# Altium PCB BEE-DAL_EXP_V1.0.PcbDoc (part 4 of 5)
Units mm, origin at the board's own origin, x right, y up, seen from the top; angles counter-clockwise.
Board outline 93 x 90 mm, 6 copper layers (L1_TOP, L2_GND, L3_SIGNAL, L4_PWR, L5_GND, L6_BOT), stack 1.608 mm thick; 548 components, 447 nets, 1827 pads, 1131 vias.
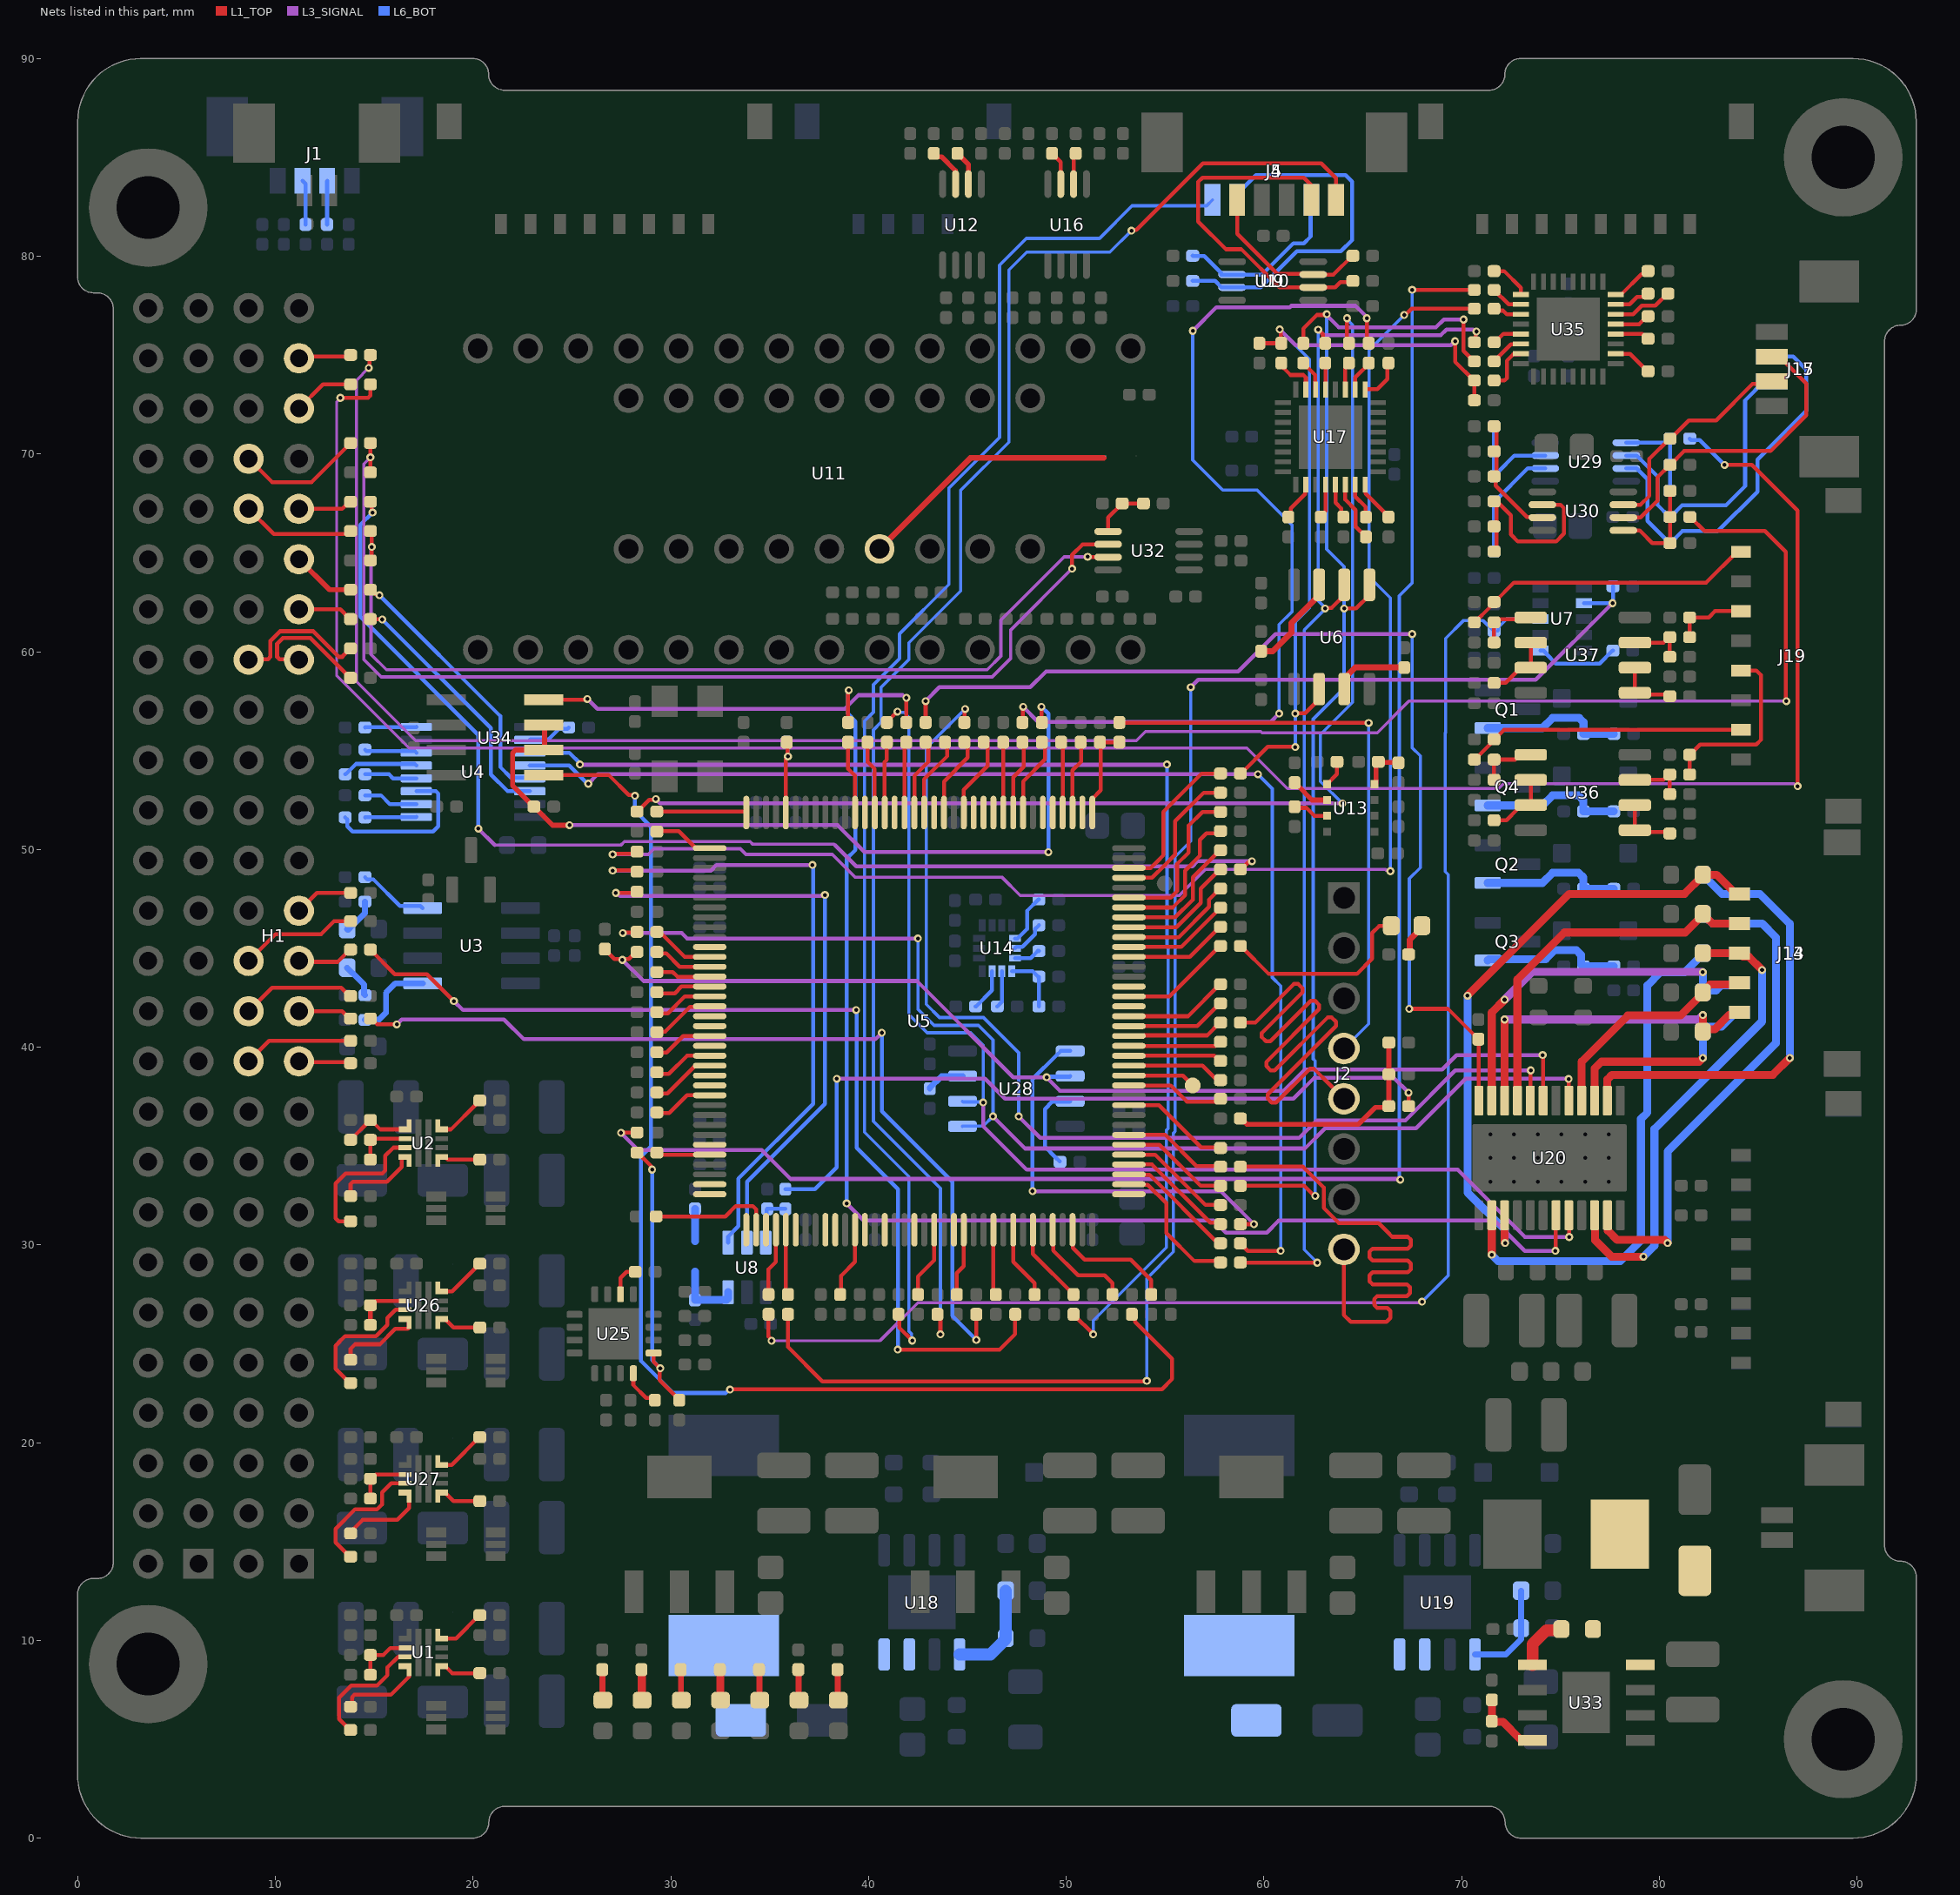
[diagram p8: the nets of this part, all layers, seen from the top]

## Via types
v1: diameter 0.4, hole 0.2, L1_TOP to L6_BOT, tented both sides, 1121 vias
v2: diameter 0.6, hole 0.3, L1_TOP to L6_BOT, tented both sides, 10 vias

## Nets (pads, with @x,y where several pads share a name; then routed paths per layer and width w, separated by ;. In a path a pad name is that pad's centre, name@x,y a point inside that pad or via, vN(x,y) a via of type N, cw(c..) or ccw(c..) an arc to the next point about the centre after c; other vN are vias at no path point) (continued)
MCU_PC104_SPI0_MOSI: R235.1 R323.1 | length 51.2
  L1_TOP w0.2: R235.1@14.805,44.933 16.043,43.695 17.664,43.695 v1(19.032,42.327) ; v1(41.481,24.704) 46.632,24.704 47.423,25.495 R323.1@47.423,26.49
  L3_SIGNAL w0.2: v1(19.032,42.327) 19.484,41.875 v1(39.375,41.875)
  L6_BOT w0.2: v1(39.375,41.875) 39.4,41.85 39.4,34.911 41.489,32.822 41.489,24.712 v1(41.481,24.704)
MCU_PC104_SPI0_SCK: R234.1 R324.2 | length 45.4
  L1_TOP w0.2: R234.1@14.805,41.45 14.847,41.45 15.147,41.15 v1(16.14,41.15) ; v1(45.456,25.196) R324.2@45.456,26.433
  L3_SIGNAL w0.2: v1(16.14,41.15) 16.389,41.4 21.567,41.4 22.567,40.4 40.347,40.4 v1(40.675,40.728)
  L6_BOT w0.2: v1(40.675,40.728) 40.675,36.755 44.244,33.186 44.244,26.408 v1(45.456,25.196)
MCU_PRAM_SPI1_nCS: R308.2 U28.1 | length 20.7
  L1_TOP w0.2: R308.2@58.808,31.048 v1(59.5,31.048)
  L3_SIGNAL w0.2: v1(48.3,32.718) 48.318,32.7 57.848,32.7 v1(59.5,31.048)
  L6_BOT w0.2: v1(48.3,32.718) 48.3,38.381 49.545,39.626 49.552,39.626 49.731,39.805 U28.1@50.204,39.805
MCU_RS232_RX_OBC_TX: R242.1 U4.13 | length 13.5
  L1_TOP w0.2: R242.1@14.805,63.133 14.857,63.133 15.095,62.895 15.227,62.895 v1(15.266,62.856)
  L6_BOT w0.2: v1(15.266,62.856) 21.377,56.745 21.377,54.171 21.92,53.628 22.837,53.628 U4.13@22.871,53.594
MCU_RS232_TX_OBC_RX: R241.1 U4.14 | length 13
  L1_TOP w0.2: R241.1@14.805,61.648 14.814,61.639 15.395,61.639 v1(15.404,61.63)
  L6_BOT w0.2: v1(15.404,61.63) 20.9,56.134 20.9,53.793 21.748,52.944 U4.14@22.871,52.944
MCU_RS485_R\E\_DE: R275.2 R313.2 U34.2 U34.3 | length 41.4
  L1_TOP w0.2: v1(48.746,57.215) 48.758,57.202 48.758,56.486 R313.2@48.824,56.42
  L1_TOP w0.25: R275.2@23.081,52.17 24.026,51.225 v1(24.874,51.225) ; R275.2@23.106,52.17 23.056,52.17 22,53.226 22,54.879 22.146,55.025 23.615,55.025 U34.3@23.615,56.295
  L3_SIGNAL w0.2: v1(24.874,51.225) 38.443,51.225 39.803,49.865 v1(49.1,49.865)
  L6_BOT w0.2: v1(48.746,57.215) 49.1,56.861 v1(49.1,49.865)
MCU_RTC_CLKOUT: R86.2 R117.1 U7.3 | length 74.8
  L1_TOP w0.2: R86.2@34.948,26.49 34.948,25.356 35.098,25.206 v1(35.098,25.151)
  L3_SIGNAL w0.15: v1(35.098,25.151) 40.581,25.151 42.505,27.075 67.809,27.075 67.82,27.087 67.962,27.087 v1(68,27.125)
  L6_BOT w0.16: v1(68,27.125) 69.325,28.45 69.325,48.73 69.175,48.88 69.175,55.89 69.194,55.909 69.194,60.676 70.085,61.567 71.093,61.567 71.618,61.042 R117.1@71.643,61.042 ; R117.1@71.826,61.042 71.851,61.067 71.851,61.225 72.28,61.653 U7.3@73.994,61.653
MCU_RTC_INT: R87.2 R118.1 U7.7 | length 81.9
  L1_TOP w0.2: R87.2@35.928,26.49 35.928,24.842 37.67,23.1 54.055,23.1 v1(54.08,23.125)
  L3_SIGNAL w0.2: v1(56.3,58.2) 56.675,58.575 73.755,58.575 v1(77.633,62.453)
  L6_BOT w0.16: v1(54.08,23.125) 54.08,28.3 55.426,29.645 55.426,35.649 55.514,35.737 55.514,49.628 56.3,50.414 v1(56.3,58.2)
  L6_BOT w0.2: U7.7@76.194,62.453 v1(77.633,62.453) 77.658,62.478 R118.1@77.658,63.303
MCU_SENSOR1_nIRQ: J4.1 R64.1 | length 79.4
  L1_TOP w0.2: R64.1@43.44,26.49 43.64,26.29 v1(43.64,25.475) ; v1(53.3,81.292) 53.338,81.33 53.554,81.33 56.923,84.7 62.9,84.7 63.65,83.95 J4.1@63.65,82.85
  L6_BOT w0.16: v1(43.64,25.475) 43.64,32.86 40.25,36.25 40.25,56.04 40.643,56.433 40.643,58.198 42.05,59.606 42.05,60.45 44.665,63.065 44.665,68.165 47.1,70.6 47.1,79.301 48.004,80.205 52.214,80.205 v1(53.3,81.292)
MCU_SENSOR2_nIRQ: J5.1 R66.1 | length 72
  L1_TOP w0.2: R66.1@41.489,26.483 41.564,26.407 41.564,25.811 v1(42.216,25.16)
  L6_BOT w0.16: v1(42.216,25.16) 42.177,25.198 42.177,25.505 42.047,25.635 42.047,33.453 39.8,35.7 39.8,56.489 40.25,56.939 40.25,58.333 41.57,59.653 41.57,60.899 44.075,63.404 44.075,68.275 46.631,70.831 46.631,79.555 47.981,80.905 51.688,80.905 53.333,82.55 57.1,82.55 J5.1@57.4,82.85
MCU_SPI0_CMD_SOLE_A: R105.2 R171.1 | length 47.9
  L1_TOP w0.2: R105.2@47.791,56.42 47.806,56.435 47.806,57.2 v1(47.822,57.215) ; v1(65.207,76.865) 65.207,75.697 R171.1@65.304,75.6
  L3_SIGNAL w0.2: v1(47.822,57.215) 48.587,56.45 60.345,56.45 v1(60.77,56.875) ; v1(56.408,76.225) 57.608,77.425 61.326,77.425 61.393,77.492 64.634,77.492 65.207,76.919 v1(65.207,76.865)
  L6_BOT w0.16: v1(56.408,76.225) 56.399,76.217 56.399,69.694 57.923,68.17 59.659,68.17 61.425,66.404 61.425,62.025 60.77,61.37 v1(60.77,56.875)
MCU_SPI0_CMD_SOLE_B: R76.1 R416.1 | length 89.6
  L1_TOP w0.2: v1(27.483,35.668) 27.487,35.672 R76.1@28.27,35.672 ; v1(67.5,78.301) R416.1@70.643,78.3
  L3_SIGNAL w0.2: v1(27.483,35.668) 28.352,34.8 34.6,34.8 36.065,33.335 66.865,33.335 v1(66.9,33.3)
  L6_BOT w0.16: v1(66.9,33.3) 66.862,33.338 66.862,33.48 66.85,33.491 66.85,62.824 67.505,63.479 67.505,78.296 v1(67.5,78.301)
MCU_SPI0_nCS_SOLE_A: R104.1 R167.1 | length 63.2
  L1_TOP w0.2: R104.1@28.27,51.92 28.32,51.92 28.907,52.507 29.204,52.507 v1(29.243,52.545) ; v1(64.207,76.865) 64.207,75.697 R167.1@64.304,75.6
  L3_SIGNAL w0.2: v1(29.243,52.545) 29.463,52.325 v1(63.975,52.324) v1(63.975,52.324)
  L6_BOT w0.16: v1(63.975,52.324) 62.86,53.439 62.86,55.81 64.489,57.439 64.489,76.525 64.207,76.808 v1(64.207,76.865)
MCU_SPI0_nCS_SOLE_B: R75.1 R412.1 | length 75.3
  L1_TOP w0.2: v1(27.062,49.748) 27.1,49.786 28.123,49.786 R75.1@28.27,49.934 ; v1(67.1,77.031) 67.154,77.031 67.473,77.35 R412.1@70.643,77.35
  L3_SIGNAL w0.16: v1(27.062,49.748) 28.868,49.748 29.152,50.033 33.519,50.033 33.802,49.75 38.169,49.75 39.319,48.6 46.74,48.6 47.672,47.669 55.723,47.669 57.046,48.992 66.145,48.992 66.191,48.946 66.354,48.946 v1(66.4,48.9)
  L6_BOT w0.16: v1(66.4,48.9) 66.4,62.713 65.318,63.794 65.318,75.249 v1(67.1,77.031)
MCU_SPI1_MISO: R108.2 R110.2 U20.7 U28.2 | length 55.6
  L1_TOP w0.2: R108.2@26.671,44.958 26.671,44.933 27.152,44.453 27.512,44.453 v1(27.55,44.414) 27.589,44.453 27.878,44.453 28.243,44.817 R110.2@28.295,44.817 ; v1(74.1,39.6) 74.113,39.587 74.113,37.313 U20.7@74.126,37.3
  L3_SIGNAL w0.2: v1(27.55,44.414) 28.619,43.346 42.454,43.346 47.324,38.476 v1(49.011,38.476) 49.687,37.8 61,37.8 62.076,38.876 69.022,38.876 69.747,39.6 v1(74.1,39.6)
  L6_BOT w0.2: v1(49.011,38.476) 49.041,38.505 50.174,38.505 U28.2@50.204,38.535
MCU_SPI1_MOSI: R111.2 U20.5 U28.5 | length 61.8
  L1_TOP w0.2: v1(27.576,45.768) 27.608,45.8 28.098,45.8 R111.2@28.27,45.972 ; v1(75.413,38.387) 75.426,38.374 U20.5@75.426,37.3
  L3_SIGNAL w0.2: v1(27.576,45.768) 30.556,45.768 30.823,45.5 v1(42.5,45.5) ; v1(46.3,36.5) 47.925,34.875 62.075,34.875 63.1,35.9 67.7,35.9 70.2,38.4 75.4,38.4 v1(75.413,38.387)
  L6_BOT w0.16: v1(42.5,45.5) 42.5,41.925 43.325,41.1 45.564,41.1 46.3,40.364 v1(46.3,36.5) 45.803,36.003 44.764,36.003 U28.5@44.756,35.995
MCU_SPI1_SCK: R107.2 U20.20 U28.6 | length 59.1
  L1_TOP w0.2: R107.2@40.931,56.42 40.931,56.438 41.463,56.97 v1(41.47,56.97) ; U20.20@75.426,31.5 75.435,31.491 75.435,30.409 v1(75.444,30.4)
  L3_SIGNAL w0.2: v1(45.8,37.2) 45.8,36 48,33.8 69.808,33.8 73.208,30.4 v1(75.444,30.4)
  L6_BOT w0.16: v1(41.47,56.97) 41.508,56.932 41.804,56.932 42.05,56.686 42.05,41.65 42.972,40.728 45.175,40.728 45.8,40.103 v1(45.8,37.2) 45.767,37.233 44.788,37.233 U28.6@44.756,37.265
MCU_STATUS_LED_1: D3.2 R31.1 | length 10
  L1_TOP w0.2: R31.1@58.808,45.116 58.833,45.116 60.249,43.7 64.7,43.7 65.478,44.478 65.478,45.771 65.837,46.131 66.436,46.131 D3.2@66.445,46.14
MCU_STEP_FAULT: R77.2 R180.1 U20.12 | length 53.7
  L1_TOP w0.2: R77.2@42.891,56.42 v1(42.891,57.5) ; v1(67.356,41.938) 69.313,41.938 70.876,40.375 U20.12@70.876,37.3
  L3_SIGNAL w0.2: v1(42.891,57.5) 43.591,58.2 48.185,58.2 48.985,59 58.7,59 60.592,60.892 v1(67.5,60.892)
  L6_BOT w0.16: v1(67.356,41.938) 67.356,48.523 67.914,49.082 67.914,54.727 67.5,55.141 v1(67.5,60.892)
MCU_STEP_SLEEP: R30.2 U20.8 | length 54.5
  L1_TOP w0.2: R30.2@44.89,56.552 44.871,56.571 44.871,57.085 v1(44.89,57.105) ; U20.8@73.476,37.3 73.488,37.312 73.488,38.813 v1(73.5,38.825)
  L3_SIGNAL w0.2: v1(47.6,36.5) 48.686,35.414 61.789,35.414 62.675,36.3 67.158,36.3 69.683,38.825 v1(73.5,38.825)
  L6_BOT w0.16: v1(44.89,57.105) 42.925,55.14 42.925,42.171 43.596,41.5 45.819,41.5 47.6,39.719 v1(47.6,36.5)
MCU_STEP_SPI1_nCS: R179.2 U20.19 | length 67.1
  L1_TOP w0.2: R179.2@38.972,56.42 38.972,58.019 v1(39,58.047) ; v1(74.746,29.698) 74.761,29.713 74.761,31.485 U20.19@74.776,31.5
  L3_SIGNAL w0.2: v1(38.9,32.1) 39.758,31.242 57.458,31.242 58.077,30.623 60.145,30.623 60.747,31.225 71.676,31.225 73.203,29.698 v1(74.746,29.698)
  L6_BOT w0.2: v1(38.9,32.1) 38.9,49.538 39.347,49.985 39.347,56.476 38.962,56.861 38.962,58.009 v1(39,58.047)
MCU_SWDIO: J2.8 R96.1 | length 30.5
  L1_TOP w0.2: R96.1@58.808,33.955 61.97,33.955 63.025,32.9 63.025,31.867 63.792,31.1 65.8,31.1 66.24,30.66 66.49,30.41 67.284,30.41 67.434,30.26 67.434,29.96 67.284,29.81 65.494,29.81 65.344,29.66 65.344,29.36 65.494,29.21 67.284,29.21 67.434,29.06 67.434,28.76 67.284,28.61 65.494,28.61 65.344,28.46 65.344,28.16 65.494,28.01 67.239,28.01 67.389,27.86 67.389,27.56 67.239,27.41 65.729,27.41 65.579,27.26 65.579,26.96 65.729,26.81 66.25,26.81 66.4,26.66 66.4,26.3 66.275,26.175 66.2,26.1 64.4,26.1 64.05,26.45 J2.8@64.05,29.77
MCU_TRACESWO: J2.4 R94.1 | length 29.5
  L1_TOP w0.2: R94.1@52.691,56.42 52.701,56.41 65.29,56.41 v1(65.3,56.4)
  L6_BOT w0.16: J2.4@64.2,40 64.2,40.08 65.295,41.175 65.295,56.395 v1(65.3,56.4)
MCU_TST: TP1.1 U5.85 | length 3.4
  L1_TOP w0.2: U5.85@53.172,38.564 55.9,38.564 TP1.1@56.4,38.064
MCU_TSWCLK: J2.5 R99.1 | length 30.9
  L1_TOP w0.2: R99.1@58.808,41.24 59.428,41.24 59.569,41.24 61.524,43.194 61.736,43.194 61.948,42.982 61.948,42.77 59.898,40.72 59.898,40.507 60.11,40.295 60.322,40.295 62.376,42.349 62.588,42.349 62.8,42.137 62.8,41.925 60.127,39.252 60.127,39.04 60.339,38.828 60.551,38.828 63.224,41.5 63.436,41.5 63.648,41.288 63.648,41.076 60.189,37.616 60.189,37.404 60.401,37.192 60.613,37.192 62.324,38.903 62.536,38.903 63.348,38.091 63.419,38.021 J2.5@64.05,37.39
MCU_UART0_RX_OBC_TX: R46.2 U4.12 | length 64.2
  L1_TOP w0.2: R46.2@58.808,30.078 59.186,29.7 v1(60.85,29.7)
  L3_SIGNAL w0.2: v1(25.831,53.325) 26.306,53.8 v1(59.7,53.8)
  L6_BOT w0.16: v1(59.7,53.8) 60.425,53.075 60.425,43.52 60.85,43.095 v1(60.85,29.7)
  L6_BOT w0.2: U4.12@22.871,54.244 24.861,54.244 25.781,53.325 v1(25.831,53.325)
MCU_UART0_TX_OBC_RX: R48.2 U4.11 | length 64.2
  L1_TOP w0.2: R48.2@50.39,26.465 51.37,25.485 v1(51.37,25.475)
  L3_SIGNAL w0.2: v1(25.406,54.301) 25.425,54.282 55.082,54.282 v1(55.1,54.3)
  L6_BOT w0.16: v1(51.37,25.475) 51.37,26.177 55.066,29.872 55.066,35.798 55.154,35.886 55.154,45.011 55.1,45.065 v1@55.1,54.208
  L6_BOT w0.2: U4.11@22.871,54.894 24.865,54.894 25.406,54.354 v1(25.406,54.301)
MCU_UART4_RX: R57.1 U34.1 | length 66.1
  L1_TOP w0.2: U34.1@23.615,53.755 26.873,53.755 27.873,52.755 28.154,52.755 v1(28.192,52.716) ; v1(33,22.685) 33.015,22.7 54.844,22.7 55.361,23.217 55.361,24.239 53.493,26.107 53.493,26.321 R57.1@53.324,26.49
  L6_BOT w0.2: v1(28.192,52.716) 28.192,51.956 29,51.148 29,34.975 28.5,34.475 28.5,24.129 30.119,22.51 32.783,22.51 32.957,22.685 v1(33,22.685)
MCU_UART4_TX: R34.1 U34.4 | length 20.2
  L1_TOP w0.2: U34.4@23.584,57.565 25.685,57.565 25.729,57.609 v1(25.783,57.609) ; R34.1@41.911,56.42 41.916,56.424 41.916,57.664 v1(41.92,57.669)
  L3_SIGNAL w0.2: v1(25.783,57.609) 26.292,57.1 38.8,57.1 39.5,57.8 41.735,57.8 41.866,57.669 v1(41.92,57.669)
MCU_USART_RXD2: R54.1 R165.2 R166.1 R410.2 R411.1 U6.2 | length 41.9
  L1_TOP w0.2: R54.1@58.808,53.839 58.846,53.839 60.2,55.193 61.574,55.193 v1(61.592,55.175) ; R165.2@59.77,75.6 60.1,75.6 60.77,75.6 R166.1@60.785,75.615 ; v1(60.8,76.3) 60.8,76.246 60.851,76.195 60.851,75.631 R166.1@60.881,75.6 ; v1(61.592,56.875) 61.6,56.883 62.092,56.883 62.796,57.587 U6.2@62.796,58.112 ; v1(69.668,75.7) 69.668,74.666 70.618,73.716 R411.1@70.643,73.716 R410.2@70.643,72.716
  L3_SIGNAL w0.2: v1(60.8,76.3) 61.6,75.5 69.451,75.5 69.651,75.7 v1(69.668,75.7)
  L6_BOT w0.16: v1(60.8,76.3) 62.3,74.8 62.3,62.222 61.592,61.514 v1(61.592,56.875) v1(61.592,55.175)
MCU_USART_SCK2: R56.1 R168.1 R413.1 U6.6 | length 63.4
  L1_TOP w0.2: R56.1@58.808,29.109 58.813,29.105 62.695,29.105 v1(62.7,29.1) ; v1(62.747,76.285) 62.77,76.285 62.999,76.056 62.999,75.705 R168.1@63.104,75.6 ; v1(63.091,62.184) 63.129,62.222 63.43,62.222 64.066,62.857 U6.6@64.066,63.382 ; R413.1@70.643,75.65 70.709,75.716 70.709,76.155 v1(70.747,76.193)
  L3_SIGNAL w0.2: v1(62.747,76.285) 63.032,76 68.943,76 69.243,76.3 70.587,76.3 70.693,76.193 v1(70.747,76.193)
  L6_BOT w0.16: v1(62.7,29.1) 62.04,29.76 62.04,61.097 63.091,62.148 63.091,62.238 62.75,62.578 62.75,74.845 62.747,74.848 v1(62.747,76.285)
MCU_USART_TXD2: R55.1 R169.1 R414.1 U6.5 | length 63.7
  L1_TOP w0.2: R55.1@58.808,32.986 62.038,32.986 62.546,32.478 v1(62.6,32.478) ; R169.1@61.993,75.6 61.993,76.345 62.678,77.031 63.142,77.031 v1(63.178,77.067) ; v1(64.06,62.184) 64.662,62.184 65.336,62.857 U6.5@65.336,63.382 ; v1(70.1,76.8) 70.093,76.793 70.093,75.208 70.618,74.683 R414.1@70.643,74.683
  L3_SIGNAL w0.2: v1(63.178,77.067) 63.178,77.013 63.791,76.4 68.7,76.4 69.1,76.8 v1(70.1,76.8)
  L6_BOT w0.16: v1(62.6,32.478) 62.6,39.303 62.495,39.408 62.495,56.59 64.06,58.155 v1(64.06,62.184) 64.06,64.303 63.178,65.184 v1(63.178,77.067)
MCU_WD_DONE: R83.1 U8.4 | length 32.3
  L1_TOP w0.2: v1(27.062,48.931) 27.067,48.936 28.265,48.936 R83.1@28.27,48.941
  L3_SIGNAL w0.2: v1(27.062,48.931) 32.027,48.931 32.311,49.214 v1(37.166,49.214)
  L6_BOT w0.2: U8.4@32.903,30.116 32.903,30.426 33.425,30.949 33.425,33.355 37.2,37.13 37.2,49.18 v1(37.166,49.214)
MCU_WD_nRESET: R80.2 R123.1 | length 38.4
  L1_TOP w0.2: R80.2@67.32,37.02 67.32,36.96 v1(67.32,37.7)
  L3_SIGNAL w0.2: v1(38.4,38.4) 45.9,38.4 46.9,37.4 61.5,37.4 62.542,38.442 66.578,38.442 v1(67.32,37.7)
  L6_BOT w0.2: R123.1@35.8,32.819 37.298,32.819 38.4,33.921 v1(38.4,38.4)
MCU_WD_WAKE: R85.1 U8.5 | length 31
  L1_TOP w0.2: v1(27.225,47.8) 28.234,47.8 R85.1@28.295,47.861
  L3_SIGNAL w0.2: v1(27.225,47.8) 27.279,47.8 27.44,47.639 37.608,47.639 37.65,47.681 37.781,47.681 v1(37.8,47.7)
  L6_BOT w0.2: U8.5@33.853,30.116 33.853,33.186 37.8,37.134 v1(37.8,47.7)
MOTOR_1_OUT_1: C88.2 J13.1 U20.2 | length 23
  L1_TOP w0.4: U20.2@77.376,37.3 77.376,38.366 77.61,38.6 85.748,38.6 v1(86.6,39.452)
  L6_BOT w0.4: C88.2@82.2,48.721 83.17,47.752 J13.1@84.058,47.752 85.086,47.752 86.6,46.238 v1(86.6,39.452)
MOTOR_1_OUT_2: C87.2 J13.2 U20.23 | length 26
  L1_TOP w0.4: U20.23@77.376,31.5 77.401,31.475 77.401,30.723 77.869,30.256 80.269,30.256 v1(80.425,30.1)
  L6_BOT w0.4: v1(80.425,30.1) 80.425,34.725 85.9,40.2 85.9,45.552 85.2,46.252 J13.2@84.058,46.252 82.686,46.252 82.469,46.468 82.446,46.468 C87.2@82.2,46.715
MOTOR_1_OUT_3: C86.2 J13.3 U20.14 | length 28.5
  L1_TOP w0.4: v1(71.526,29.5) U20.14@71.526,31.5
  L6_BOT w0.4: v1(71.526,29.5) 71.853,29.173 78.023,29.173 79.073,30.224 79.073,36.373 79.396,36.696 79.396,43.117 80.069,43.791 81.287,43.791 82.2,44.704 C86.2@82.2,44.754 ; C86.2@82.201,44.753 J13.3@84.057,44.753
MOTOR_1_OUT_4: C85.2 J13.4 U20.11 | length 19.1
  L1_TOP w0.4: U20.11@71.526,37.3 71.526,41.75 v1(72.176,42.4)
  L3_SIGNAL w0.4: v1(72.176,42.4) 73.576,43.8 82.191,43.8 v1(82.2,43.791)
  L6_BOT w0.4: v1(82.2,43.791) C85.2@82.2,42.77 82.298,42.77 82.4,42.871 82.88,42.871 83.145,43.137 83.943,43.137 J13.4@84.058,43.252
MOTOR_1_OUT_5: C84.2 J13.5 U20.3 | length 10.9
  L1_TOP w0.4: U20.3@76.726,37.3 76.726,37.7 76.726,38.2 76.726,38.919 77.074,39.266 82.015,39.266 v1(82.201,39.452)
  L6_BOT w0.4: v1@82.2,39.453 82.2,40.836 82.4,41.036 83.151,41.036 83.867,41.752 J13.5@84.058,41.752
MOTOR_2_OUT_1: C93.2 J14.1 U20.10 | length 17.3
  L1_TOP w0.4: U20.10@72.176,37.348 v1(72.176,41.4) ; v1@82.2,41.621 C93.2@82.2,40.786 82.319,40.904 82.804,40.904 83.522,41.622 83.928,41.622 J14.1@84.058,41.752
  L3_SIGNAL w0.4: v1(72.176,41.4) 81.979,41.4 v1(82.201,41.622)
MOTOR_2_OUT_2: C92.2 J14.2 U20.4 | length 11.6
  L1_TOP w0.4: U20.4@76.076,37.3 76.076,37.7 76.076,38.2 76.076,39.266 78.41,41.6 81.08,41.6 82.2,42.72 82.2,42.793 82.568,43.161 83.967,43.161 J14.2@84.058,43.252
MOTOR_2_OUT_3: C91.2 J14.3 U20.22 | length 24.3
  L1_TOP w0.4: U20.22@76.726,31.5 76.751,31.475 76.751,30.237 77.589,29.4 v1(79.2,29.4) ; C91.2@82.4,44.884 82.4,44.798 82.446,44.752 J14.3@84.058,44.752 84.238,44.572 84.528,44.572 v1@85.181,43.919
  L6_BOT w0.4: v1(79.2,29.4) 79.757,29.957 79.757,35.857 85.2,41.3 v1(85.2,43.9)
MOTOR_2_OUT_4: C90.2 J14.4 U20.9 | length 18.9
  L1_TOP w0.4: U20.9@72.826,37.3 72.826,37.8 72.826,43.424 75.202,45.8 81.312,45.8 C90.2@82.2,46.688 ; C90.2@82.2,46.738 C90.2@82.2,46.688 ; J14.4@84.058,46.252 82.686,46.252 82.45,46.488 82.4,46.488 C90.2@82.2,46.688
MOTOR_2_OUT_5: C89.2 J14.5 U20.15 | length 31.2
  L1_TOP w0.4: v1(70.3,42.6) 75.452,47.752 81.28,47.752 82.2,48.671 C89.2@82.2,48.721 82.898,48.721 J14.5@83.867,47.752 ; U20.15@72.176,31.5 72.176,30.124 v1(72.2,30.1)
  L6_BOT w0.4: v1(70.3,42.6) 70.3,32.655 72.2,30.755 v1(72.2,30.1)
NetC5_2: C5.2 U1.10 | length 2.4
  L1_TOP w0.2: U1.10@18.412,10.091 19.137,10.091 20.318,11.273 C5.2@20.343,11.273
NetC6_2: C6.2 U1.7 | length 2.1
  L1_TOP w0.2: U1.7@18.412,8.691 18.587,8.691 18.937,8.341 C6.2@20.343,8.341
NetC11_2: C11.2 U2.10 | length 2.5
  L1_TOP w0.2: U2.10@18.412,35.844 18.885,35.844 20.168,37.126 20.168,37.151 20.318,37.301 C11.2@20.343,37.301
NetC12_2: C12.2 U2.7 | length 2
  L1_TOP w0.2: U2.7@18.412,34.444 18.587,34.444 18.713,34.317 C12.2@20.343,34.317
NetC17_1: C17.1 U4.3 | length 8.1
  L6_BOT w0.2: C17.1@13.533,51.619 13.638,51.515 13.638,51.162 13.9,50.9 17.97,50.9 18.235,51.165 18.235,52.827 18.118,52.944 U4.3@17.131,52.944
NetC17_2: C17.2 U4.1 | length 2.6
  L6_BOT w0.2: C17.2@14.533,51.619 14.546,51.632 17.118,51.632 U4.1@17.131,51.644
NetC19_1: C19.1 D17.1 L3.1 U33.8
NetC19_2: C19.2 U33.1 | length 2.8
  L1_TOP w0.6: U33.1@73.586,8.753 73.588,8.756 73.588,9.808 74.295,10.515 74.997,10.515 C19.2@75.049,10.567
NetC23_2: C23.2 R78.1 R80.1 R81.2 | length 11.2
  L1_TOP w0.25: R81.2@58.808,36.394 58.846,36.394 59.143,36.097 64.785,36.097 65.649,36.96 66.26,36.96 R80.1@66.32,37.02 66.32,39.175 R78.1@66.32,40.23
NetC24_2: C24.2 R113.2 U5.140 | length 4.4
  L1_TOP w0.2: U5.140@35.822,51.864 35.822,54.546 35.928,54.652 v1(35.928,54.707) ; R113.2@35.84,55.4 35.899,55.341 35.899,54.728 v1@35.921,54.707
  L6_BOT w0.2: C24.2@35.87,55.42 35.899,55.391 35.899,54.735 v1(35.928,54.707)
NetC65_1: C65.1 U17.24 | length 2.2
  L1_TOP w0.2: U17.24@65.12,68.45 65.147,68.423 65.147,67.991 66.329,66.809 C65.1@66.385,66.809
NetC66_1: C66.1 U17.22 | length 3.1
  L1_TOP w0.2: U17.22@64.12,68.45 64.12,67.686 64.637,67.169 64.637,66.334 C66.1@65.162,65.809
NetC66_2: C66.2 U17.23 | length 1.8
  L1_TOP w0.2: U17.23@64.62,68.45 64.62,67.851 65.154,67.317 65.154,66.971 C66.2@65.211,66.915
NetC67_2: C67.2 U17.20 | length 1.7
  L1_TOP w0.2: C67.2@62.879,66.809 62.879,66.861 63.12,67.103 U17.20@63.12,68.45
NetC72_2: C72.2 R174.1 U18.5 | length 5.1
  L6_BOT w0.6: U18.5@44.607,9.287 46.168,9.287 C72.2@46.942,10.061 ; C72.2@46.942,10.111 R174.1@46.942,12.511
NetC77_2: C77.2 R177.1 U19.5 | length 5.1
  L6_BOT w0.3: U19.5@70.679,9.288 72.24,9.288 73.014,10.062 ; 73.014,10.112 R177.1@73.014,12.511
NetC126_2: C126.2 U26.10 | length 2.5
  L1_TOP w0.2: U26.10@18.412,27.646 18.939,27.646 20.168,28.876 20.168,28.901 20.318,29.051 C126.2@20.343,29.051
NetC127_2: C127.2 U26.7 | length 2.1
  L1_TOP w0.2: U26.7@18.412,26.246 18.587,26.246 19.012,25.821 C127.2@20.343,25.821
NetC132_2: C132.2 U27.10 | length 2.5
  L1_TOP w0.2: U27.10@18.412,18.867 18.914,18.867 20.318,20.272 C132.2@20.343,20.272
NetC133_2: C133.2 U27.7 | length 2.1
  L1_TOP w0.2: U27.7@18.412,17.467 18.587,17.467 19.012,17.042 C133.2@20.343,17.042
NetC142_1: C142.1 U4.5 | length 3.8
  L6_BOT w0.2: C142.1@13.533,53.799 13.558,53.799 14.083,54.324 17.051,54.324 U4.5@17.131,54.244
NetC142_2: C142.2 U4.4 | length 2.7
  L6_BOT w0.2: C142.2@14.533,53.799 15.749,53.799 15.954,53.594 U4.4@17.131,53.594
NetC143_2: C143.2 U4.6 | length 2.7
  L6_BOT w0.2: C143.2@14.533,55.048 14.61,54.971 17.054,54.971 U4.6@17.131,54.894
NetC144_2: C144.2 U4.2 | length 2.8
  L6_BOT w0.2: C144.2@14.533,52.739 15.344,52.739 15.789,52.294 U4.2@17.131,52.294
NetC171_2: C171.2 R345.2 U36.3 | length 2.9
  L1_TOP w0.2: U36.3@78.77,53.517 80.208,53.517 80.483,53.792 R345.2@80.535,53.792 C171.2@80.535,52.796
NetC173_2: C173.2 R348.2 U36.5 | length 3
  L1_TOP w0.2: C173.2@71.643,53.521 R348.2@71.643,54.544 72.706,54.544 72.949,54.787 U36.5@73.5,54.787
NetC176_2: C176.2 R351.2 U37.3 | length 2.9
  L1_TOP w0.2: U37.3@78.77,60.461 80.208,60.461 80.483,60.736 R351.2@80.535,60.736 C176.2@80.535,59.741
NetC178_2: C178.2 R354.2 U37.5 | length 2.8
  L1_TOP w0.2: C178.2@71.643,60.466 R354.2@71.643,61.338 ; R354.2@71.643,61.488 71.793,61.638 73.407,61.638 U37.5@73.5,61.731
NetC409_1: C409.1 U35.24 | length 2.1
  L1_TOP w0.2: U35.24@77.794,78.066 78.073,78.066 79.088,79.081 79.265,79.081 C409.1@79.435,79.25
NetC410_1: C410.1 U35.22 | length 3.1
  L1_TOP w0.2: U35.22@77.794,77.066 78.679,77.066 79.115,77.503 79.804,77.503 80.41,78.108 C410.1@80.435,78.108
NetC410_2: C410.2 U35.23 | length 1.9
  L1_TOP w0.2: U35.23@77.794,77.566 78.5,77.566 78.873,77.939 79.265,77.939 C410.2@79.435,78.108
NetC411_2: C411.2 U35.20 | length 1.7
  L1_TOP w0.2: U35.20@77.794,76.066 79.141,76.066 79.382,75.825 C411.2@79.435,75.825
NetD3_1: D3.1 R35.1 | length 1.7
  L1_TOP w0.3: R35.1@67.36,44.69 67.379,44.709 67.379,45.44 67.995,46.056 D3.1@67.995,46.14
NetD4_2: D4.2 L1.1 U18.7 U18.8
NetD6_2: D6.2 L2.1 U19.7 U19.8
NetD10_1: D10.1 R5.2 | length 1.7
  L1_TOP w0.3: R5.2@26.535,8.638 26.551,8.622 26.551,6.999 D10.1@26.567,6.983
NetD11_1: D11.1 R13.2 | length 1.6
  L1_TOP w0.4: R13.2@32.483,8.52 32.502,8.501 32.502,6.994 D11.1@32.52,6.975
NetD12_1: D12.1 R256.2 | length 1.6
  L1_TOP w0.3: R256.2@38.431,8.52 38.452,8.499 38.452,6.996 D12.1@38.473,6.975
NetD13_1: D13.1 R257.2 | length 1.6
  L1_TOP w0.3: R257.2@34.466,8.52 34.485,8.501 34.485,6.994 D13.1@34.505,6.975
NetD14_1: D14.1 R258.2 | length 1.6
  L1_TOP w0.3: R258.2@36.448,8.52 36.469,8.5 36.469,6.995 D14.1@36.489,6.975
NetD15_1: D15.1 R263.2 | length 1.6
  L1_TOP w0.3: R263.2@30.501,8.52 30.518,8.502 30.518,6.993 D15.1@30.536,6.975
NetD16_1: D16.1 R271.2 | length 1.7
  L1_TOP w0.4: R271.2@28.518,8.52 28.535,8.503 28.535,6.882 D16.1@28.552,6.865
NetH1_21: H1.21 R233.2 | length 2.7
  L1_TOP w0.2: H1.21@11.19,39.28 11.237,39.233 13.758,39.233 R233.2@13.805,39.186
NetH1_22: H1.22 R311.2 | length 5.6
  L1_TOP w0.2: H1.22@8.65,39.28 9.688,40.318 13.667,40.318 R311.2@13.805,40.456
NetH1_23: H1.23 R234.2 | length 2.8
  L1_TOP w0.2: H1.23@11.19,41.82 13.383,41.82 13.753,41.45 R234.2@13.805,41.45
NetH1_24: H1.24 R307.1 | length 5.8
  L1_TOP w0.2: H1.24@8.65,41.82 9.83,43 13.336,43 13.753,42.583 R307.1@13.805,42.583
NetH1_25: H1.25 R235.2 | length 2.9
  L1_TOP w0.2: H1.25@11.19,44.36 11.237,44.313 13.16,44.313 13.78,44.933 R235.2@13.805,44.933
NetH1_26: H1.26 R312.1 | length 6
  L1_TOP w0.2: H1.26@8.65,44.36 10.001,45.711 12.311,45.711 12.97,46.37 R312.1@13.805,46.37
NetH1_27: H1.27 R236.2 | length 3
  L1_TOP w0.2: H1.27@11.19,46.9 12.096,47.806 R236.2@13.805,47.806
NetH1_39: H1.39 R241.2 | length 2.8
  L1_TOP w0.2: H1.39@11.19,62.14 13.284,62.14 13.78,61.644 R241.2@13.805,61.644
NetH1_41: H1.41 R242.2 | length 3.3
  L1_TOP w0.254: H1.41@11.19,64.68 12.737,63.133 R242.2@13.805,63.133
NetH1_43: H1.43 R243.2 | length 2.8
  L1_TOP w0.2: H1.43@11.19,67.22 13.379,67.22 13.742,67.583 R243.2@13.805,67.583
NetH1_44: H1.44 R244.1 | length 5.7
  L1_TOP w0.2: H1.44@8.65,67.22 9.919,65.951 13.655,65.951 R244.1@13.805,66.101
NetH1_46: H1.46 R246.1 | length 6.5
  L1_TOP w0.2: H1.46@8.65,69.76 9.83,68.58 11.831,68.58 R246.1@13.805,70.554
NetH1_47: H1.47 R304.2 | length 3.1
  L1_TOP w0.2: H1.47@11.19,72.3 12.412,73.522 R304.2@13.805,73.522
NetH1_49: H1.49 R305.2 | length 2.7
  L1_TOP w0.2: H1.49@11.19,74.84 11.273,74.923 13.722,74.923 R305.2@13.805,75.006
NetJ1_2: J1.2 R25.1 | length 2.3
  L6_BOT w0.2: J1.2@11.374,83.81 11.525,83.659 R25.1@11.525,81.605
NetJ1_3: J1.3 R26.1 | length 2.2
  L6_BOT w0.2: R26.1@12.618,81.605 12.618,83.804 J1.3@12.624,83.81
NetJ4_2: J4.2 R128.2 U9.6 | length 18.1
  L1_TOP w0.2: J4.2@62.4,82.85 62.4,83.6 62.025,83.975 56.892,83.975 56.679,83.762 56.679,81.753 58.08,80.352 58.863,80.352 60.79,78.425 U9.6@62.495,78.425 63.606,78.425 63.875,78.694 64.444,78.694 R128.2@64.5,78.75
NetJ4_5: J4.5 R129.2 U9.7 | length 8.8
  L1_TOP w0.2: J4.5@58.65,82.85 58.65,81.131 60.677,79.104 62.466,79.104 U9.7@62.495,79.075 63.525,79.075 64.475,80.025 R129.2@64.5,80.025
NetJ5_2: J5.2 R131.2 U10.6 | length 18.8
  L6_BOT w0.2: R131.2@56.4,78.75 57.528,78.75 57.853,78.425 59.85,78.425 61.674,80.249 63.896,80.249 64.461,80.814 64.461,83.779 64.14,84.1 59.6,84.1 58.65,83.15 J5.2@58.65,82.85
NetJ5_5: J5.5 R132.2 U10.7 | length 9.1
  L6_BOT w0.2: R132.2@56.4,80.025 56.408,80.017 56.984,80.017 57.841,79.16 57.841,79.084 57.85,79.075 59.91,79.075 61.485,80.649 62.021,80.649 62.363,80.992 62.363,82.813 J5.5@62.4,82.85
NetJ15_2: J15.2 R284.2 U29.7 | length 19.7
  L6_BOT w0.2: U29.7@78.333,69.272 78.858,69.272 79.4,68.73 79.4,66.615 80.518,65.497 R284.2@80.543,65.497 80.568,65.497 81.172,66.1 82.97,66.1 84.964,68.094 84.964,69.716 87.433,72.184 87.433,74.267 86.778,74.922 J15.2@85.7,74.922
NetJ15_3: J15.3 R283.2 U29.6 | length 14.9
  L6_BOT w0.2: U29.6@78.333,69.922 78.858,69.922 79.9,68.88 79.9,67.435 80.518,66.817 R283.2@80.543,66.817 80.568,66.817 81.152,67.4 83.375,67.4 84.341,68.366 84.341,72.713 85.3,73.672 J15.3@85.7,73.672
NetJ17_2: J17.2 R295.2 U30.7 | length 10.9
  L1_TOP w0.2: U30.7@78.529,67.434 79.054,67.434 79.5,67.88 79.5,69.758 80.518,70.777 R295.2@80.543,70.777 80.568,70.777 81.492,71.7 82.878,71.7 84.717,73.539 85.568,73.539 J17.2@85.7,73.672
NetJ17_3: J17.3 R294.2 U30.6 | length 15.7
  L1_TOP w0.2: U30.6@78.529,66.784 79.054,66.784 79.9,67.63 79.9,68.813 R294.2@80.543,69.457 80.568,69.457 81.257,70.145 85.626,70.145 87.433,71.952 87.433,73.567 86.4,74.6 86.4,74.622 86.1,74.922 J17.3@85.7,74.922
NetJP3_1: JP3.1 R124.2 | length 1.6
  L6_BOT w0.4: JP3.1@31.228,30.188 R124.2@31.228,31.819
NetJP3_2: JP3.2 R125.2 U8.3 | length 3.5
  L6_BOT w0.4: JP3.2@31.228,28.651 R125.2@31.228,27.213 32.808,27.213 32.903,27.308 U8.3@32.903,27.606
NetJP4_2: JP4.2 U11.15 | length 13.2
  L1_TOP w0.3: U11.15@40.56,65.2 45.16,69.8 51.9,69.8
NetJP6_1: JP6.1 R17.2 | length 1.9
  L6_BOT w0.3: JP6.1@13.633,45.97 13.675,45.928 13.903,46.156 13.92,46.156 14.533,46.77 R17.2@14.533,47.358
NetJP7_2: JP7.2 R19.1 | length 1.8
  L6_BOT w0.3: JP7.2@13.633,44.019 13.633,44.003 13.903,43.732 13.92,43.732 14.49,43.162 14.49,42.676 R19.1@14.533,42.633
NetQ1_1: Q1.1 R336.2 R338.2 | length 7.3
  L6_BOT w0.4: Q1.1@71.326,56.141 74.091,56.141 74.6,56.65 75.947,56.65 76.169,56.429 R336.2@76.169,55.841 R338.2@77.7,55.841
NetQ2_1: Q2.1 R337.2 R339.2 | length 7.3
  L6_BOT w0.4: Q2.1@71.326,48.307 74.091,48.307 74.6,48.817 75.924,48.817 76.158,48.582 76.158,48.018 R337.2@76.169,48.007 76.344,48.007 R339.2@77.7,48.007
NetQ3_1: Q3.1 R340.2 R342.2 | length 7.2
  L6_BOT w0.4: Q3.1@71.326,44.391 71.389,44.454 74.253,44.454 74.699,44.9 75.809,44.9 76.044,44.666 76.044,44.191 76.144,44.091 R340.2@76.169,44.091 R342.2@77.7,44.091
NetQ4_1: Q4.1 R341.2 R343.2 | length 7.3
  L6_BOT w0.4: Q4.1@71.326,52.224 74.091,52.224 74.6,52.733 75.924,52.733 76.158,52.499 76.158,51.935 R341.2@76.169,51.924 R343.2@77.7,51.924
NetR2_1: R2.1 R7.2 U1.2 | length 2.9
  L1_TOP w0.2: R2.1@14.805,8.258 R7.2@14.805,9.263 15.47,9.263 15.823,9.616 U1.2@16.565,9.616
NetR3_1: R3.1 U1.3 | length 6.3
  L1_TOP w0.2: R3.1@13.805,5.465 13.78,5.465 13.23,6.015 13.23,7.104 13.834,7.708 15.145,7.708 15.673,8.236 15.673,8.632 16.208,9.167 U1.3@16.562,9.167
NetR4_1: R4.1 U1.4 | length 4.2
  L1_TOP w0.2: R4.1@13.805,6.643 13.879,6.717 13.879,7.126 13.996,7.243 15.841,7.243 16.762,8.164 U1.4@16.762,8.516
NetR9_1: R9.1 R15.2 U2.2 | length 2.8
  L1_TOP w0.2: R15.2@14.805,34.317 R9.1@14.805,35.317 14.856,35.368 U2.2@16.565,35.368
NetR9_2: R9.2 R10.1 U2.1 | length 3.4
  L1_TOP w0.2: R9.2@13.805,35.317 R10.1@14.805,36.317 14.83,36.317 15.303,35.844 U2.1@16.565,35.844
NetR11_1: R11.1 U2.3 | length 7.3
  L1_TOP w0.2: R11.1@13.805,31.196 13.2,31.196 13.054,31.343 13.054,33.104 13.559,33.609 15.414,33.609 15.561,33.756 15.561,34.514 15.965,34.919 U2.3@16.562,34.919
NetR12_1: R12.1 U2.4 | length 4.2
  L1_TOP w0.2: R12.1@13.805,32.471 13.805,33.077 13.922,33.194 15.644,33.194 16.387,33.937 16.387,34.394 16.437,34.444 U2.4@16.562,34.444
NetR18_2: R18.2 U3.5 | length 4.3
  L6_BOT w0.3: R18.2@14.533,41.383 15.233,41.383 15.596,41.745 15.596,42.742 16.081,43.228 U3.5@17.452,43.228
NetR20_2: R20.2 U3.8 | length 3.6
  L6_BOT w0.2: R20.2@14.533,48.6 14.659,48.475 14.969,48.475 16.298,47.145 17.344,47.145 U3.8@17.452,47.038
NetR61_2: R61.2 R250.2 U25.1 | length 14.4
  L1_TOP w0.2: R61.2@28.27,34.67 28.32,34.67 29.02,33.97 29.02,33.845 v1(29.058,33.807) ; U25.1@29.133,24.533 29.133,24.097 v1(29.47,23.76) 29.446,23.736 29.446,23.16 30.433,22.173 R250.2@30.433,22.148
  L6_BOT w0.2: v1(29.058,33.807) 29.058,24.172 v1(29.47,23.76)
NetR115_1: R115.1 U6.7 | length 4.9
  L1_TOP w0.3: R115.1@59.86,60.025 60.445,60.025 61.395,60.975 61.395,61.456 62.796,62.857 U6.7@62.796,63.382
NetR116_1: R116.1 U6.3 | length 3.8
  L1_TOP w0.3: U6.3@64.066,58.112 64.066,58.637 64.636,59.207 67.093,59.207 R116.1@67.1,59.2
NetR121_2: R121.2 U7.1 | length 4.2
  L6_BOT w0.2: U7.1@73.994,60.053 74.144,60.053 74.294,59.903 74.294,59.875 74.769,59.4 76.98,59.4 77.633,60.053 R121.2@77.658,60.053
NetR122_1: R122.1 R123.2 U8.6 | length 2.7
  L6_BOT w0.2: U8.6@34.803,30.116 34.842,30.155 34.842,31.78 R122.1@34.881,31.819 R123.2@35.8,31.819
NetR140_2: R140.2 U13.2 | length 1.7
  L1_TOP w0.2: R140.2@61.555,52.16 61.612,52.103 62.155,52.103 62.559,51.7 U13.2@63.1,51.7
NetR141_2: R141.2 R144.1 U13.5 | length 2.4
  L1_TOP w0.25: U13.5@65.6,53.3 65.675,53.375 65.675,54.315 R144.1@65.79,54.43 65.815,54.405 66.795,54.405 R141.2@66.9,54.3
NetR142_1: R142.1 U13.3 | length 2
  L1_TOP w0.25: R142.1@61.555,53.38 61.555,53.369 61.729,53.195 61.74,53.195 62.435,52.5 U13.3@63.2,52.5
NetR143_2: R143.2 U13.4 | length 1.5
  L1_TOP w0.2: U13.4@63.2,53.3 63.7,53.8 63.7,54.5 R143.2@63.8,54.6
NetR145_2: R145.2 U14.2 | length 1.9
  L6_BOT w0.2: R145.2@46.519,42.064 46.519,42.066 46.75,42.297 U14.2@46.75,43.84
NetR146_2: R146.2 U14.3 | length 2.1
  L6_BOT w0.2: R146.2@45.419,42.064 45.444,42.064 46.25,42.87 U14.3@46.25,43.84
NetR147_2: R147.2 U14.12 | length 2.6
  L6_BOT w0.2: U14.12@47.41,45.5 47.54,45.5 48.02,45.98 48.02,46.89 48.594,47.464 R147.2@48.619,47.464
NetR148_2: R148.2 R152.1 U14.1 | length 3
  L6_BOT w0.2: U14.1@47.25,43.84 48.305,43.84 48.581,43.564 R152.1@48.619,43.564 R148.2@48.619,42.064
NetR150_2: R150.2 U14.13 | length 1.8
  L6_BOT w0.2: U14.13@47.41,45 47.485,45.075 47.783,45.075 48.425,45.717 48.425,45.97 R150.2@48.619,46.164
NetR151_2: R151.2 U14.14 | length 1.4
  L6_BOT w0.2: U14.14@47.41,44.5 48.203,44.5 48.567,44.864 R151.2@48.619,44.864
NetR161_2: R161.2 U16.2 | length 1.6
  L1_TOP w0.2: U16.2@50.376,83.65 50.376,84.979 50.529,85.131 R161.2@50.569,85.131
NetR162_2: R162.2 U16.3 | length 1.7
  L1_TOP w0.2: R162.2@49.286,85.2 49.726,84.76 U16.3@49.726,83.65
NetR164_2: R164.2 U17.1 | length 2.2
  L1_TOP w0.2: U17.1@65.12,73.25 65.147,73.278 65.741,73.278 66.247,73.785 66.247,74.543 R164.2@66.304,74.6
NetR166_2: R166.2 U17.7 | length 2.3
  L1_TOP w0.2: R166.2@60.77,74.575 61.351,73.994 62.003,73.994 62.12,73.877 U17.7@62.12,73.25
NetR167_2: R167.2 U17.3 | length 1.4
  L1_TOP w0.2: U17.3@64.12,73.25 64.12,74.364 64.304,74.548 R167.2@64.304,74.6
NetR168_2: R168.2 U17.5 | length 1.4
  L1_TOP w0.2: R168.2@63.104,74.6 63.12,74.584 U17.5@63.12,73.25
NetR169_2: R169.2 U17.6 | length 1.6
  L1_TOP w0.2: R169.2@61.987,74.6 62.593,73.994 62.593,73.277 U17.6@62.62,73.25
NetR170_2: R170.2 U17.21 | length 1.8
  L1_TOP w0.2: U17.21@63.62,68.45 63.62,67.54 63.905,67.255 63.905,66.924 R170.2@64.02,66.809
NetR171_2: R171.2 U17.2 | length 1.7
  L1_TOP w0.2: U17.2@64.62,73.25 64.62,73.866 R171.2@65.354,74.6
NetR172_2: R172.2 U17.18 | length 2
  L1_TOP w0.2: R172.2@61.237,66.809 61.364,66.936 61.364,67.243 62.093,67.973 62.093,68.423 U17.18@62.12,68.45
NetR249_2: R249.2 U25.16 | length 2
  L1_TOP w0.2: U25.16@28.108,23.508 28.108,22.909 28.753,22.264 29.084,22.264 R249.2@29.199,22.148
NetR251_1: R251.1 U25.6 | length 1.6
  L1_TOP w0.2: U25.6@27.458,27.508 27.458,28.336 27.76,28.638 R251.1@28.085,28.638
NetR260_1: R260.1 R265.2 U26.2 | length 2.5
  L1_TOP w0.2: R265.2@15.063,27.17 U26.2@16.565,27.17
  L1_TOP w0.25: R260.1@14.805,25.951 R265.2@14.805,26.951
NetR261_1: R261.1 U26.3 | length 6.7
  L1_TOP w0.2: R261.1@13.766,23.013 13.04,23.739 13.04,24.899 13.521,25.38 15.09,25.38 15.666,25.956 15.666,26.3 16.087,26.721 U26.3@16.562,26.721
NetR262_1: R262.1 U26.4 | length 4.2
  L1_TOP w0.2: R262.1@13.805,24.188 13.805,24.751 14.03,24.975 15.285,24.975 16.066,25.756 16.697,25.756 16.737,25.796 16.737,26.046 U26.4@16.762,26.071
NetR268_1: R268.1 R273.2 U27.2 | length 2.9
  L1_TOP w0.2: R268.1@14.805,17.172 R273.2@14.805,18.172 14.844,18.172 15.063,18.392 U27.2@16.565,18.392
NetR269_1: R269.1 U27.3 | length 6.6
  L1_TOP w0.2: R269.1@13.805,14.234 13.766,14.234 13.04,14.96 13.04,15.634 14.027,16.622 15.146,16.622 15.399,16.875 15.399,17.48 15.862,17.942 U27.3@16.562,17.942
NetR270_1: R270.1 U27.4 | length 4
  L1_TOP w0.2: R270.1@13.83,15.509 14.42,16.099 16.169,16.099 16.762,16.692 U27.4@16.762,17.292
NetR277_2: R277.2 R278.1 U32.5 | length 2.8
  L1_TOP w0.2: U32.5@52.123,66.082 52.123,66.788 R278.1@52.834,67.5 R277.2@53.909,67.5
NetR279_1: R279.1 R322.2 U33.4 | length 3.5
  L1_TOP w0.4: R279.1@71.532,6.99 R322.2@71.532,5.912 71.562,5.882 72.088,5.882 72.96,5.01 73.519,5.01 U33.4@73.586,4.943
NetR281_2: R281.2 R286.2 R302.2 U29.3 | length 5.3
  L6_BOT w0.2: R281.2@71.643,68.868 R302.2@71.643,71.4 ; R281.2@71.826,69.096 71.851,69.096 72.677,69.922 U29.3@74.233,69.922
NetR282_2: R282.2 R285.2 R289.2 U29.2 | length 5.8
  L6_BOT w0.2: R285.2@71.643,65.069 R289.2@71.643,66.335 R282.2@71.643,67.601 71.674,67.601 73.344,69.272 U29.2@74.233,69.272
NetR287_2: R287.2 R288.1 R315.2 U29.5 | length 4.9
  L6_BOT w0.2: U29.5@78.333,70.572 80.286,70.572 80.491,70.777 R315.2@80.543,70.777 R288.1@80.543,69.457 R287.2@80.543,68.137
NetR292_2: R292.2 R297.2 R317.2 U30.3 | length 6.4
  L1_TOP w0.2: R292.2@71.643,68.867 71.729,68.781 71.729,68.392 73.312,66.809 74.405,66.809 U30.3@74.429,66.784 ; R292.2@71.77,68.867 71.77,70.134 R317.2@71.77,71.4
NetR293_2: R293.2 R296.2 R316.2 U30.2 | length 9.6
  L1_TOP w0.2: R296.2@71.77,65.068 71.77,66.335 71.77,67.601 71.795,67.601 72.5,66.896 72.5,65.923 72.854,65.569 74.779,65.569 75.186,65.975 75.186,67.259 75.011,67.434 U30.2@74.429,67.434
NetR298_2: R298.2 R299.1 R318.2 U30.5 | length 5.1
  L1_TOP w0.2: U30.5@78.529,66.134 79.014,66.134 79.083,66.065 79.083,66.056 79.643,65.497 R299.1@80.543,65.497 R318.2@80.543,67.082 ; R318.2@80.386,66.949 80.518,67.082 R318.2@80.543,67.082 ; R298.2@80.543,68.137 R318.2@80.543,67.082
NetR319_2: R319.2 U4.8 | length 2.6
  L6_BOT w0.2: R319.2@14.533,56.169 14.546,56.182 17.118,56.182 U4.8@17.131,56.194
NetR320_2: R320.2 U4.10 | length 2.2
  L6_BOT w0.2: U4.10@22.871,55.544 22.904,55.577 23.822,55.577 24.346,56.102 24.772,56.102 R320.2@24.84,56.169
NetR321_2: R321.2 U12.2 | length 1.8
  L1_TOP w0.25: R321.2@44.501,85.2 44.501,85.189 44.674,85.015 44.686,85.015 45.055,84.646 U12.2@45.055,83.65
NetR327_1: R327.1 U28.7 | length 1.9
  L6_BOT w0.3: R327.1@43.1,37.905 43.1,37.93 43.705,38.535 U28.7@44.756,38.535
NetR328_1: R328.1 U28.3 | length 4.4
  L6_BOT w0.2: R328.1@49.669,34.221 49.463,34.427 48.925,34.966 48.925,36.872 49.291,37.238 50.177,37.238 U28.3@50.204,37.265
NetR331_2: R331.2 U12.3 | length 2.1
  L1_TOP w0.25: R331.2@43.305,85.2 43.478,85.026 43.699,85.026 44.386,84.339 44.386,83.669 U12.3@44.405,83.65
NetR344_1: R344.1 U36.1 U36.2 | length 3.1
  L1_TOP w0.2: U36.2@78.77,52.247 U36.1@78.77,50.977 78.855,50.891 R344.1@80.535,50.891
NetR347_1: R347.1 U36.6 U36.7 | length 3.5
  L1_TOP w0.2: R347.1@71.643,51.476 72.268,51.476 72.809,52.016 72.809,52.055 73,52.247 U36.7@73.5,52.247 U36.6@73.5,53.517
NetR350_1: R350.1 U37.1 U37.2 | length 3.1
  L1_TOP w0.2: U37.2@78.77,59.191 U37.1@78.77,57.921 78.855,57.836 80.449,57.836 R350.1@80.535,57.75
NetR353_1: R353.1 U37.6 U37.7 | length 3.4
  L1_TOP w0.2: R353.1@71.643,58.42 72.229,58.42 73,59.191 U37.7@73.5,59.191 U37.6@73.5,60.461
NetR409_2: R409.2 U35.1 | length 2
  L1_TOP w0.2: R409.2@71.643,79.25 72.152,79.25 72.993,78.409 U35.1@72.993,78.066
NetR411_2: R411.2 U35.7 | length 2.4
  L1_TOP w0.2: R411.2@71.643,73.716 72.17,73.716 72.287,73.833 72.287,74.712 72.615,75.039 72.966,75.039 U35.7@72.993,75.066
NetR412_2: R412.2 U35.3 | length 1.5
  L1_TOP w0.2: R412.2@71.643,77.35 71.744,77.249 72.104,77.249 72.287,77.066 U35.3@72.993,77.066
NetR413_2: R413.2 U35.5 | length 1.5
  L1_TOP w0.2: R413.2@71.643,75.65 71.696,75.65 72.112,76.066 U35.5@72.993,76.066
NetR414_2: R414.2 U35.6 | length 1.7
  L1_TOP w0.2: R414.2@71.643,74.683 72.5,75.539 72.966,75.539 U35.6@72.993,75.566
NetR415_2: R415.2 U35.21 | length 1.8
  L1_TOP w0.2: U35.21@77.794,76.566 78.982,76.566 79.382,76.966 R415.2@79.435,76.966
NetR416_2: R416.2 U35.2 | length 1.7
  L1_TOP w0.2: R416.2@71.643,78.3 72.377,77.566 U35.2@72.993,77.566
NetR417_2: R417.2 U35.18 | length 2
  L1_TOP w0.2: U35.18@77.794,75.066 78.526,75.066 79.41,74.183 R417.2@79.435,74.183
NTC1-: J19.2 R348.1 R349.2 | length 14.1
  L1_TOP w0.2: R348.1@70.643,54.544 70.668,54.544 71.449,55.325 71.449,55.371 71.548,55.47 R349.2@71.643,55.47 ; R349.2@71.643,55.567 71.668,55.567 72.152,56.05 J19.2@84.13,56.05
NTC2-: J19.4 R345.1 R346.2 | length 9.3
  L1_TOP w0.2: R345.1@81.535,53.792 R346.2@81.535,54.787 81.56,54.787 82.073,55.3 84.9,55.3 85.137,55.537 85.137,58.825 84.912,59.05 J19.4@84.13,59.05
NTC3-: J19.6 R351.1 R352.2 | length 3.7
  L1_TOP w0.2: R351.1@81.535,60.736 R352.2@81.535,61.731 82.499,61.731 82.818,62.05 J19.6@84.13,62.05
NTC4-: J19.8 R354.1 R355.2 | length 15
  L1_TOP w0.2: R354.1@70.643,61.488 70.668,61.488 71.449,62.269 71.449,62.317 R355.2@71.643,62.511 71.668,62.511 72.655,63.498 82.378,63.498 83.93,65.05 J19.8@84.13,65.05
PA00: R27.1 U5.102 | length 7.4
  L1_TOP w0.2: U5.102@53.172,47.064 55.391,47.064 56.009,47.683 56.009,48.351 56.009,48.924 56.767,49.682 56.767,50.488 57.087,50.808 57.684,50.808 R27.1@57.808,50.932
PA01: R29.1 U5.99 | length 5.9
  L1_TOP w0.2: U5.99@53.172,45.564 55.694,45.564 57.22,47.09 57.22,47.461 57.783,48.024 R29.1@57.808,48.024
PA02: R31.2 U5.93 | length 5.7
  L1_TOP w0.2: U5.93@53.172,42.564 55.231,42.564 57.783,45.116 R31.2@57.808,45.116
PA03: R33.1 U5.91 | length 5.3
  L1_TOP w0.2: U5.91@53.172,41.564 56.169,41.564 57.783,43.178 R33.1@57.808,43.178
PA04: R36.1 U5.77 | length 5.7
  L1_TOP w0.2: U5.77@53.172,34.564 54.501,34.564 57.049,32.017 R36.1@57.808,32.017
PA05: U5.73
PA06: U5.114
PA07: U5.35
PA08: U5.36
PA09: R46.1 U5.75 | length 6.1
  L1_TOP w0.2: U5.75@53.172,33.564 53.191,33.545 54.22,33.545 57.518,30.248 57.639,30.248 R46.1@57.808,30.078
PA10: R48.1 U5.66 | length 4.1
  L1_TOP w0.2: U5.66@48.322,30.764 48.322,29.542 R48.1@50.373,27.49
PA11: R79.1 U5.64 | length 3.7
  L1_TOP w0.2: U5.64@47.322,30.764 47.322,29.15 48.406,28.065 R79.1@48.406,27.514
PA12: R303.1 U5.68 | length 5.3
  L1_TOP w0.2: U5.68@49.322,30.764 49.341,30.745 49.341,29.72 50.606,28.455 51.95,28.455 52.34,28.064 R303.1@52.34,27.49
PA13: U5.42
PA14: U5.51
PA15: U5.49
PA16: U5.45
PA17: U5.25
PA18: U5.24
PA19: R58.1 U5.23 | length 3.3
  L1_TOP w0.2: R58.1@29.27,37.654 29.831,37.654 31.222,39.045 31.952,39.045 U5.23@31.972,39.064
PA20: R60.1 U5.22 | length 3.1
  L1_TOP w0.2: R60.1@29.27,38.644 29.901,38.644 30.822,39.564 U5.22@31.972,39.564
PA21: R61.1 U5.32 | length 2.7
  L1_TOP w0.2: R61.1@29.27,34.67 29.376,34.564 29.435,34.564 U5.32@31.972,34.564
PA22: U5.37
PA23: U5.46
PA24: R42.1 U5.56 | length 3.6
  L1_TOP w0.2: R42.1@42.506,27.49 42.506,28.404 43.322,29.22 U5.56@43.322,30.764
PA25: R44.1 U5.59 | length 3.4
  L1_TOP w0.2: R44.1@44.472,27.49 44.472,28.57 44.822,28.919 U5.59@44.822,30.764
PA26: R69.1 U5.62 | length 3.3
  L1_TOP w0.2: U5.62@46.322,30.764 46.322,27.608 R69.1@46.439,27.49
PA27: R71.1 U5.70 | length 6.3
  L1_TOP w0.2: U5.70@50.322,30.764 50.341,30.745 50.341,29.852 50.938,29.255 53.265,29.255 54.307,28.212 R71.1@54.307,27.49
PA28: R73.1 U5.112 | length 3.6
  L1_TOP w0.2: U5.112@49.822,51.864 49.841,51.884 49.841,55.326 R73.1@49.935,55.42
PA29: U5.129
PA30: R313.1 U5.116 | length 4.1
  L1_TOP w0.2: U5.116@47.822,51.864 47.822,53.441 48.93,54.55 48.93,55.314 R313.1@48.824,55.42
PA31: R325.1 U5.118 | length 3.6
  L1_TOP w0.2: U5.118@46.822,51.864 46.822,55.351 R325.1@46.89,55.42
PB00: U5.21
PB01: R334.2 U5.20 | length 3
  L1_TOP w0.2: R334.2@29.27,39.733 29.795,39.733 30.626,40.564 U5.20@31.972,40.564
PB02: R326.2 U5.26 | length 3.1
  L1_TOP w0.2: R326.2@29.27,36.664 29.922,36.664 30.822,37.564 U5.26@31.972,37.564
PB03: U5.31
PB04: R92.2 U5.105 | length 7.4
  L1_TOP w0.2: U5.105@53.172,48.564 54.345,48.564 55,49.219 ; 55,49.22 55.515,49.735 55.515,51.43 56.954,52.87 R92.2@57.808,52.87
PB05: R94.2 R97.2 U5.109 | length 4.7
  L1_TOP w0.2: U5.109@51.322,51.864 51.322,52.564 51.752,52.995 51.752,55.42 R94.2@52.691,55.42
PB06: R96.2 U5.79 | length 5.3
  L1_TOP w0.2: U5.79@53.172,35.564 55.012,35.564 56.591,33.986 57.777,33.986 R96.2@57.808,33.955
PB07: R99.2 U5.89 | length 4.9
  L1_TOP w0.2: U5.89@53.172,40.564 53.191,40.584 53.958,40.584 53.97,40.595 57.139,40.595 57.783,41.24 R99.2@57.808,41.24
PB12: R14.2 U5.87 | length 4.7
  L1_TOP w0.2: U5.87@53.172,39.564 57.493,39.564 57.756,39.301 R14.2@57.808,39.301
PB13: R104.2 U5.144 | length 4.6
  L1_TOP w0.2: R104.2@29.27,51.92 33.775,51.92 33.822,51.874 U5.144@33.822,51.864
PC00: U5.11
PC01: R82.1 U5.38 | length 6.4
  L1_TOP w0.2: R82.1@29.26,31.44 32.753,31.44 33.283,31.97 34.146,31.97 34.322,31.794 U5.38@34.322,30.764
PC02: U5.39
PC03: R86.1 U5.40 | length 3.4
  L1_TOP w0.2: R86.1@34.948,27.49 34.948,28.77 35.322,29.144 U5.40@35.322,30.764
PC04: R87.1 U5.41 | length 3.3
  L1_TOP w0.2: U5.41@35.822,30.764 35.822,27.597 R87.1@35.928,27.49
PC05: U5.58
PC06: U5.54
PC07: R47.1 U5.48 | length 3.6
  L1_TOP w0.2: R47.1@38.568,27.49 38.621,27.543 38.621,28.441 39.322,29.141 U5.48@39.322,30.764
PC08: R49.1 U5.82 | length 5.5
  L1_TOP w0.2: U5.82@53.172,37.064 54.691,37.064 56.831,34.924 R49.1@57.808,34.924
PC09: R88.1 U5.86 | length 5
  L1_TOP w0.2: U5.86@53.172,39.064 56.9,39.064 57.783,38.182 R88.1@57.808,38.182
PC10: R90.1 U5.90 | length 5.1
  L1_TOP w0.2: U5.90@53.172,41.064 56.639,41.064 57.783,42.209 R90.1@57.808,42.209
PC11: U5.94
PC12: R93.1 U5.17 | length 3.3
  L1_TOP w0.2: R93.1@29.27,40.67 29.386,40.786 29.716,40.786 30.975,42.045 31.952,42.045 U5.17@31.972,42.064
PC13: U5.19
PC14: R98.1 U5.97 | length 5.3
  L1_TOP w0.2: U5.97@53.172,44.564 56.262,44.564 57.783,46.086 R98.1@57.808,46.086
PC15: U5.18
PC16: R101.1 U5.100 | length 6.3
  L1_TOP w0.2: U5.100@53.172,46.064 55.58,46.064 56.809,47.294 56.809,48.02 57.783,48.993 R101.1@57.808,48.993
PC17: R102.1 U5.103 | length 8
  L1_TOP w0.2: U5.103@53.172,47.564 55.286,47.564 55.609,47.888 55.609,49.264 56.2,49.855 56.2,51.21 56.891,51.901 R102.1@57.808,51.901
PC18: R103.1 U5.111 | length 3.9
  L1_TOP w0.2: U5.111@50.322,51.864 50.322,53.999 50.757,54.435 50.757,55.335 R103.1@50.757,55.42 ; R103.1@50.814,55.335 R103.1@50.958,55.335
PC19: R105.1 U5.117 | length 3.8
  L1_TOP w0.2: U5.117@47.322,51.864 47.322,53.649 47.857,54.185 R105.1@47.857,55.42
PC20: U5.120
PC21: R106.1 U5.122 | length 4.1
  L1_TOP w0.2: U5.122@44.822,51.864 44.822,53.022 46.022,54.222 R106.1@46.022,55.42
PC22: R30.1 U5.124 | length 4.1
  L1_TOP w0.2: U5.124@43.822,51.864 43.822,53.439 45.022,54.639 R30.1@45.022,55.42
PC23: R77.1 U5.127 | length 3.8
  L1_TOP w0.2: U5.127@42.322,51.864 42.322,53.722 43.023,54.423 R77.1@43.023,55.42
PC24: R107.1 U5.130 | length 3.6
  L1_TOP w0.2: U5.130@40.822,51.864 40.822,54.423 40.931,54.533 R107.1@40.931,55.42
PC25: R179.1 U5.133 | length 3.7
  L1_TOP w0.2: R179.1@38.972,55.42 38.972,54.081 39.322,53.731 U5.133@39.322,51.864
PC26: R110.1 U5.13 | length 2.9
  L1_TOP w0.2: R110.1@29.388,44.889 29.388,44.866 29.516,44.738 29.777,44.738 30.45,44.064 U5.13@31.972,44.064
PC27: R111.1 U5.12 | length 3.3
  L1_TOP w0.2: R111.1@29.27,45.972 29.295,45.972 30.702,44.564 U5.12@31.972,44.564
PC28: R308.1 U5.76 | length 5.9
  L1_TOP w0.2: U5.76@53.172,34.064 54.347,34.064 57.288,31.124 57.732,31.124 R308.1@57.808,31.048
PC29: R309.1 U5.16 | length 3
  L1_TOP w0.2: R309.1@29.295,41.714 29.854,41.714 30.704,42.564 U5.16@31.972,42.564
PC30: R310.1 U5.15 | length 2.8
  L1_TOP w0.2: R310.1@29.295,42.725 30.201,42.725 30.54,43.064 U5.15@31.972,43.064
PC31: R335.1 U5.14 | length 2.8
  L1_TOP w0.2: R335.1@29.295,43.803 30.106,43.803 30.344,43.564 U5.14@31.972,43.564
PC104_CAM1_EN: R304.1 R315.1 | length 113.6
  L1_TOP w0.2: v1(13.29,72.84) 14.688,72.84 14.805,72.958 R304.1@14.805,73.522 ; v1(83.3,69.447) 84.689,69.447 87,67.135 v1(87,53.2)
  L3_SIGNAL w0.15: v1(13.29,72.84) 13.29,72.813 13.1,72.623 13.1,58.8 16.768,55.132 59.138,55.132 61.195,53.075 71.882,53.075 72.128,53.321 86.811,53.321 86.932,53.2 v1(87,53.2)
  L6_BOT w0.2: R315.1@81.543,70.777 81.611,70.709 82.037,70.709 v1(83.3,69.447)
PC104_CAM2_EN: R305.1 R318.1 | length 104.4
  L1_TOP w0.2: v1(14.725,74.35) 14.763,74.388 14.763,74.965 R305.1@14.805,75.006 ; R318.1@81.543,66.817 81.568,66.817 82.285,66.1 85.35,66.1 86.4,65.05 86.4,57.525 v1(86.425,57.5)
  L3_SIGNAL w0.15: v1(14.725,74.35) 14.102,73.728 14.102,58.498 17.1,55.5 53.552,55.5 54.008,55.957 59.844,55.957 59.9,55.9 65.735,55.9 67.335,57.5 v1(86.425,57.5)
PC104_I2C_IRQ1: R101.2 R243.1 | length 60.3
  L1_TOP w0.2: R243.1@14.805,67.585 14.877,67.513 14.877,67.077 v1(14.916,67.038) ; R101.2@58.808,48.993 58.86,48.993 59.234,49.367 59.362,49.367 v1(59.4,49.405)
  L3_SIGNAL w0.16: 21.105,50.214 27.473,50.214 27.652,50.393 34.02,50.393 34.154,50.259 38.263,50.259 38.307,50.214
  L3_SIGNAL w0.2: v1(20.271,51.048) 21.105,50.214 ; 38.307,50.214 39.382,49.139 56.382,49.139 56.643,49.4 59.395,49.4 v1(59.4,49.405)
  L6_BOT w0.2: v1(14.916,67.038) 14.3,66.423 14.3,61.766 20.271,55.795 v1(20.271,51.048)
PC104_I2C_SCL: R238.1 R246.2 U32.6 | length 53.9
  L1_TOP w0.2: R238.1@14.805,69.069 v1(14.805,69.83) R246.2@14.805,70.552 ; v1(50.3,64.2) 50.295,64.205 50.295,64.895 50.832,65.432 U32.6@52.123,65.432
  L3_SIGNAL w0.16: v1(14.805,69.83) 14.472,69.497 14.472,59.607 15.354,58.725 46.255,58.725 47.2,59.67 47.2,61.1 v1(50.3,64.2)
PC104_I2C_SDA: R237.1 R244.2 U32.7 | length 48
  L1_TOP w0.2: R237.1@14.805,64.617 14.872,64.684 v1@14.872,65.295 ; R244.2@14.805,66.101 14.877,66.029 v1(14.877,65.3) ; v1(51.087,64.8) 51.096,64.791 52.114,64.791 U32.7@52.123,64.782
  L3_SIGNAL w0.16: v1(14.877,65.3) 14.841,65.264 14.841,59.859 15.615,59.085 46.004,59.085 46.7,59.781 46.7,61.6 49.9,64.8 v1(51.087,64.8)
PC104_RS485_N: H1.37 R239.2 | length 6.5
  L1_TOP w0.211: H1.37@11.19,59.6 11.171,59.619 10.213,59.619 10.089,59.743 10.089,60.409 10.375,60.695 11.779,60.695 13.794,58.68 R239.2@13.805,58.68
PC104_RS485_P: H1.38 R240.1 | length 7.1
  L1_TOP w0.211: H1.38@8.65,59.6 8.902,59.852 9.135,59.619 9.627,59.619 9.751,59.743 9.751,60.549 10.235,61.033 11.919,61.033 13.208,59.743 13.383,59.743 R240.1@13.805,60.164
PD00: R28.2 U5.1 | length 3.1
  L1_TOP w0.2: R28.2@29.27,50.927 30.409,50.927 31.272,50.064 U5.1@31.972,50.064
PD01: U5.132
PD02: R32.2 U5.131 | length 3.7
  L1_TOP w0.2: R32.2@39.952,55.42 39.952,54.432 40.302,54.081 40.302,51.884 U5.131@40.322,51.864
PD03: R34.2 U5.128 | length 3.6
  L1_TOP w0.2: U5.128@41.822,51.864 41.822,55.276 R34.2@41.965,55.42
PD04: R37.2 U5.126 | length 4
  L1_TOP w0.2: U5.126@42.822,51.864 42.822,53.553 43.99,54.721 R37.2@43.99,55.42
PD05: U5.125
PD06: U5.121
PD07: U5.119
PD08: U5.113
PD09: U5.110
PD10: R22.2 U5.101 | length 6.7
  L1_TOP w0.2: U5.101@53.172,46.564 55.515,46.564 56.409,47.459 56.409,48.589 57.783,49.962 R22.2@57.808,49.962
PD11: R38.2 U5.98 | length 5.5
  L1_TOP w0.2: U5.98@53.172,45.064 55.818,45.064 R38.2@57.808,47.055
PD12: U5.92
PD13: R39.2 U5.88 | length 4.7
  L1_TOP w0.2: U5.88@53.172,40.064 57.55,40.064 57.756,40.27 R39.2@57.808,40.27
PD14: R40.2 U5.84 | length 5
  L1_TOP w0.2: U5.84@53.172,38.064 55.296,38.064 56.112,37.248 R40.2@57.802,37.248
PD15: R54.2 U5.106 | length 7.9
  L1_TOP w0.2: U5.106@53.172,49.064 54.279,49.064 54.6,49.385 54.92,49.706 54.92,51.903 56.856,53.839 R54.2@57.808,53.839
PD16: R55.2 U5.78 | length 5.5
  L1_TOP w0.2: U5.78@53.172,35.064 54.724,35.064 56.802,32.986 R55.2@57.808,32.986
PD17: R56.2 U5.74 | length 7.1
  L1_TOP w0.2: U5.74@53.172,33.064 53.191,33.045 54.128,33.045 55.066,32.107 55.066,30.603 56.491,29.178 R56.2@57.739,29.178